# Altium PCB SleepTrackerPoC.PcbDoc
Units mm, origin at the board's own origin, x right, y up, seen from the top; angles counter-clockwise.
Board outline 24 x 24.8 mm, 2 copper layers (Top Layer, Bottom Layer), stack 1.671 mm thick; 33 components, 19 nets, 133 pads, 48 vias.
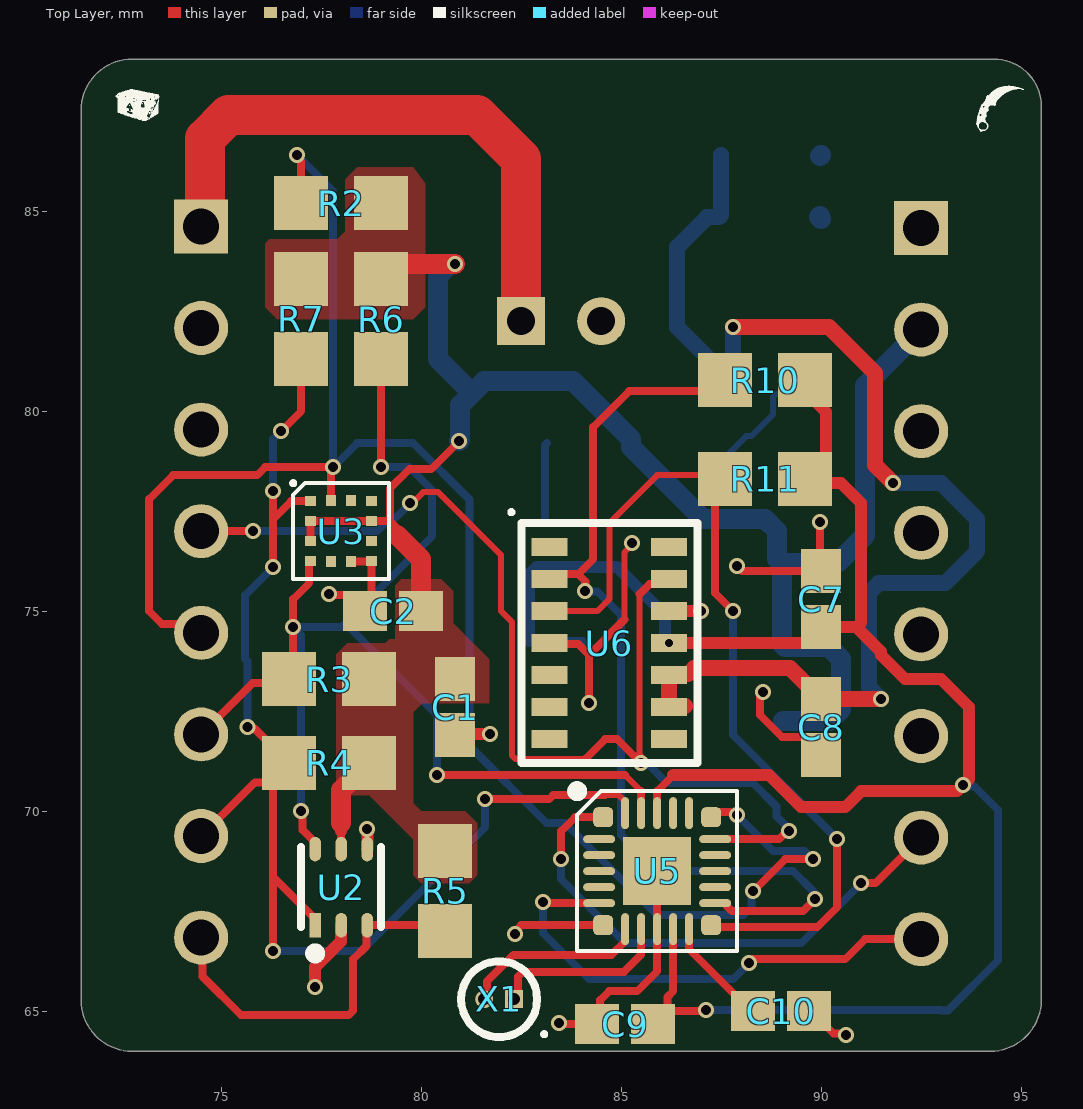
[diagram p0: Top Layer view]
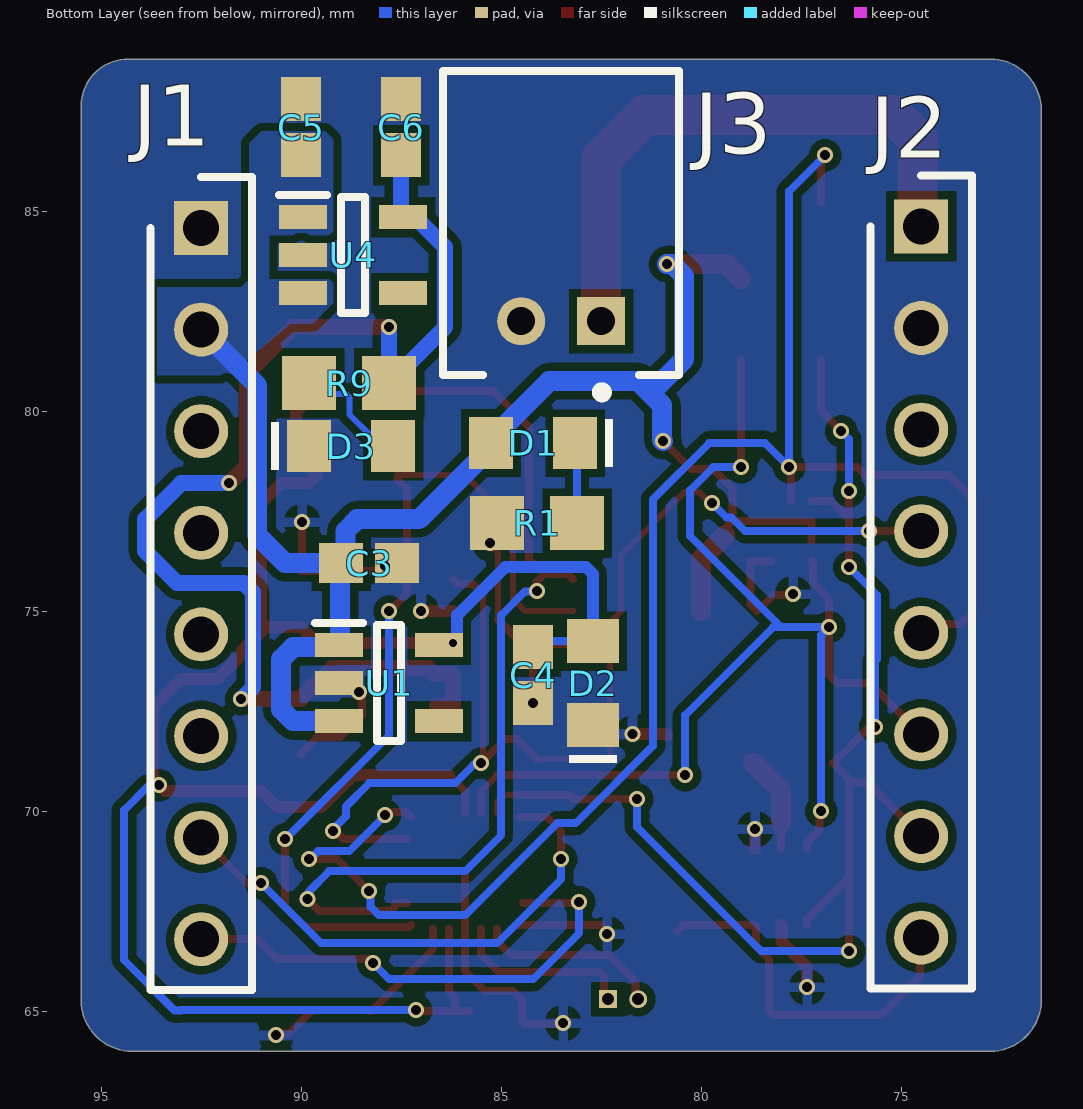
[diagram p1: Bottom Layer view, seen from below]
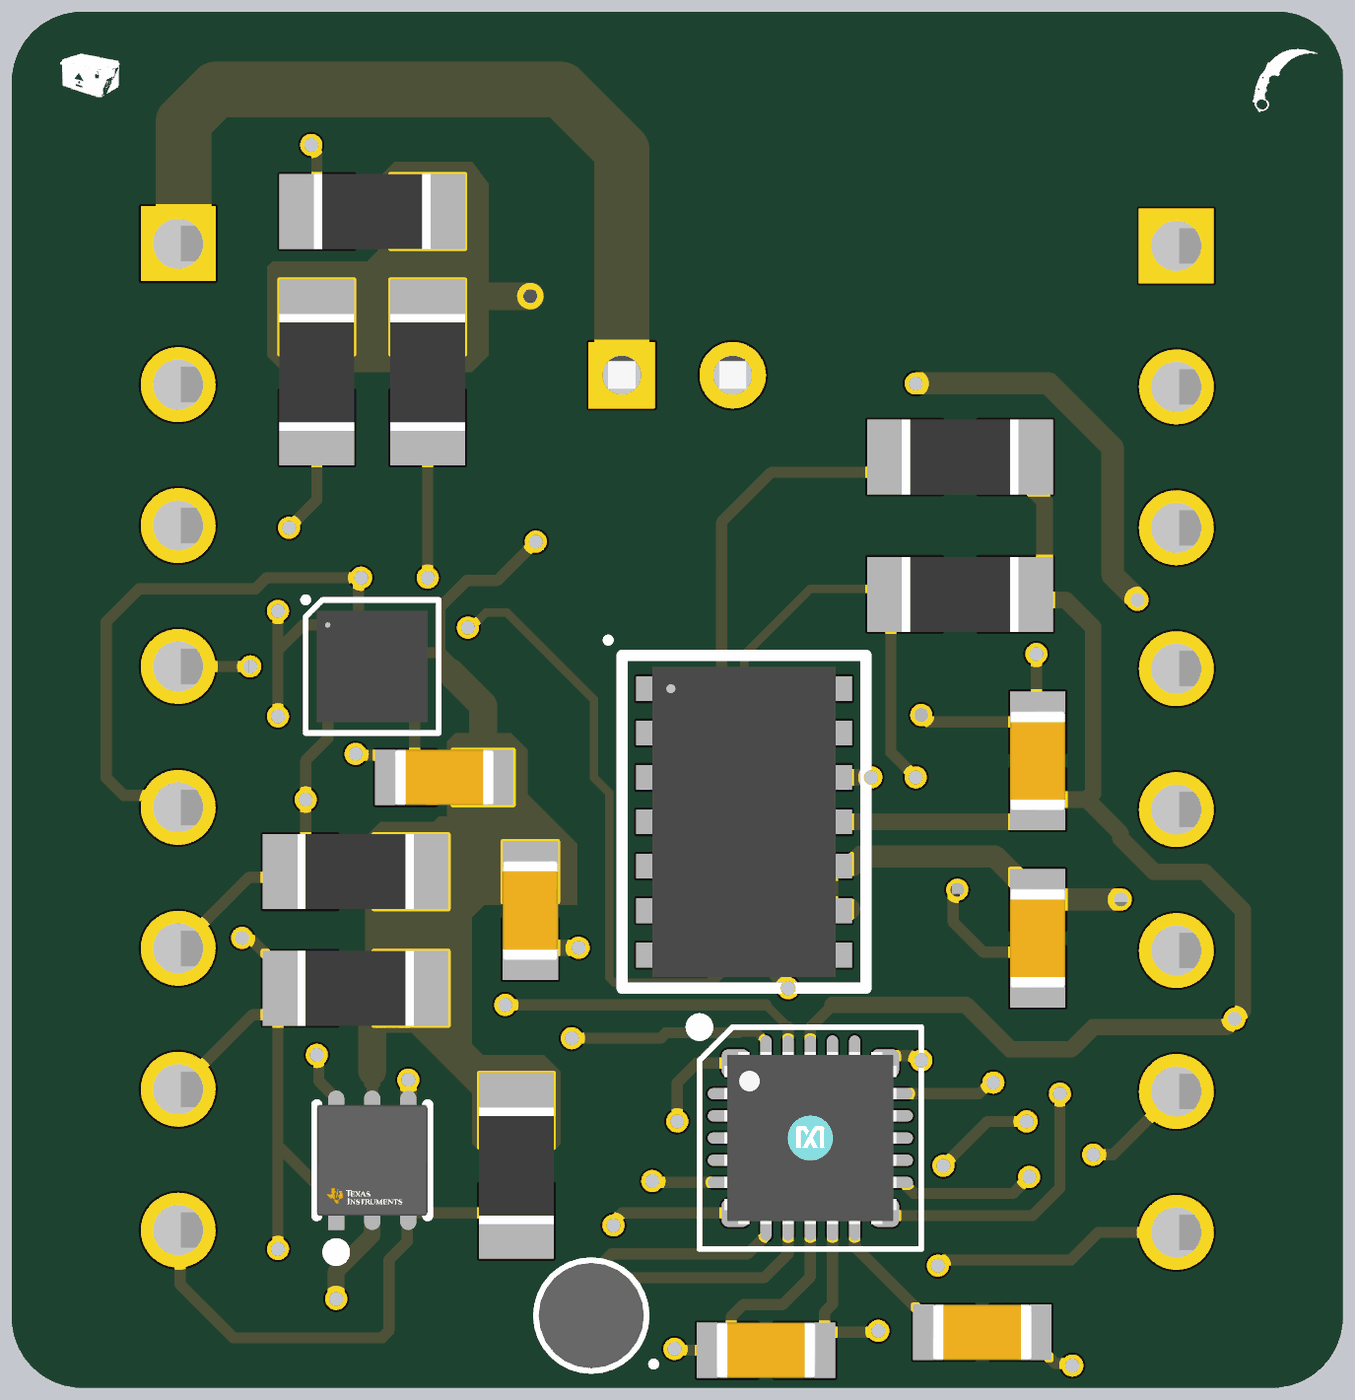
[diagram p2: 3D render of the assembled board from above, using the file's embedded part models]
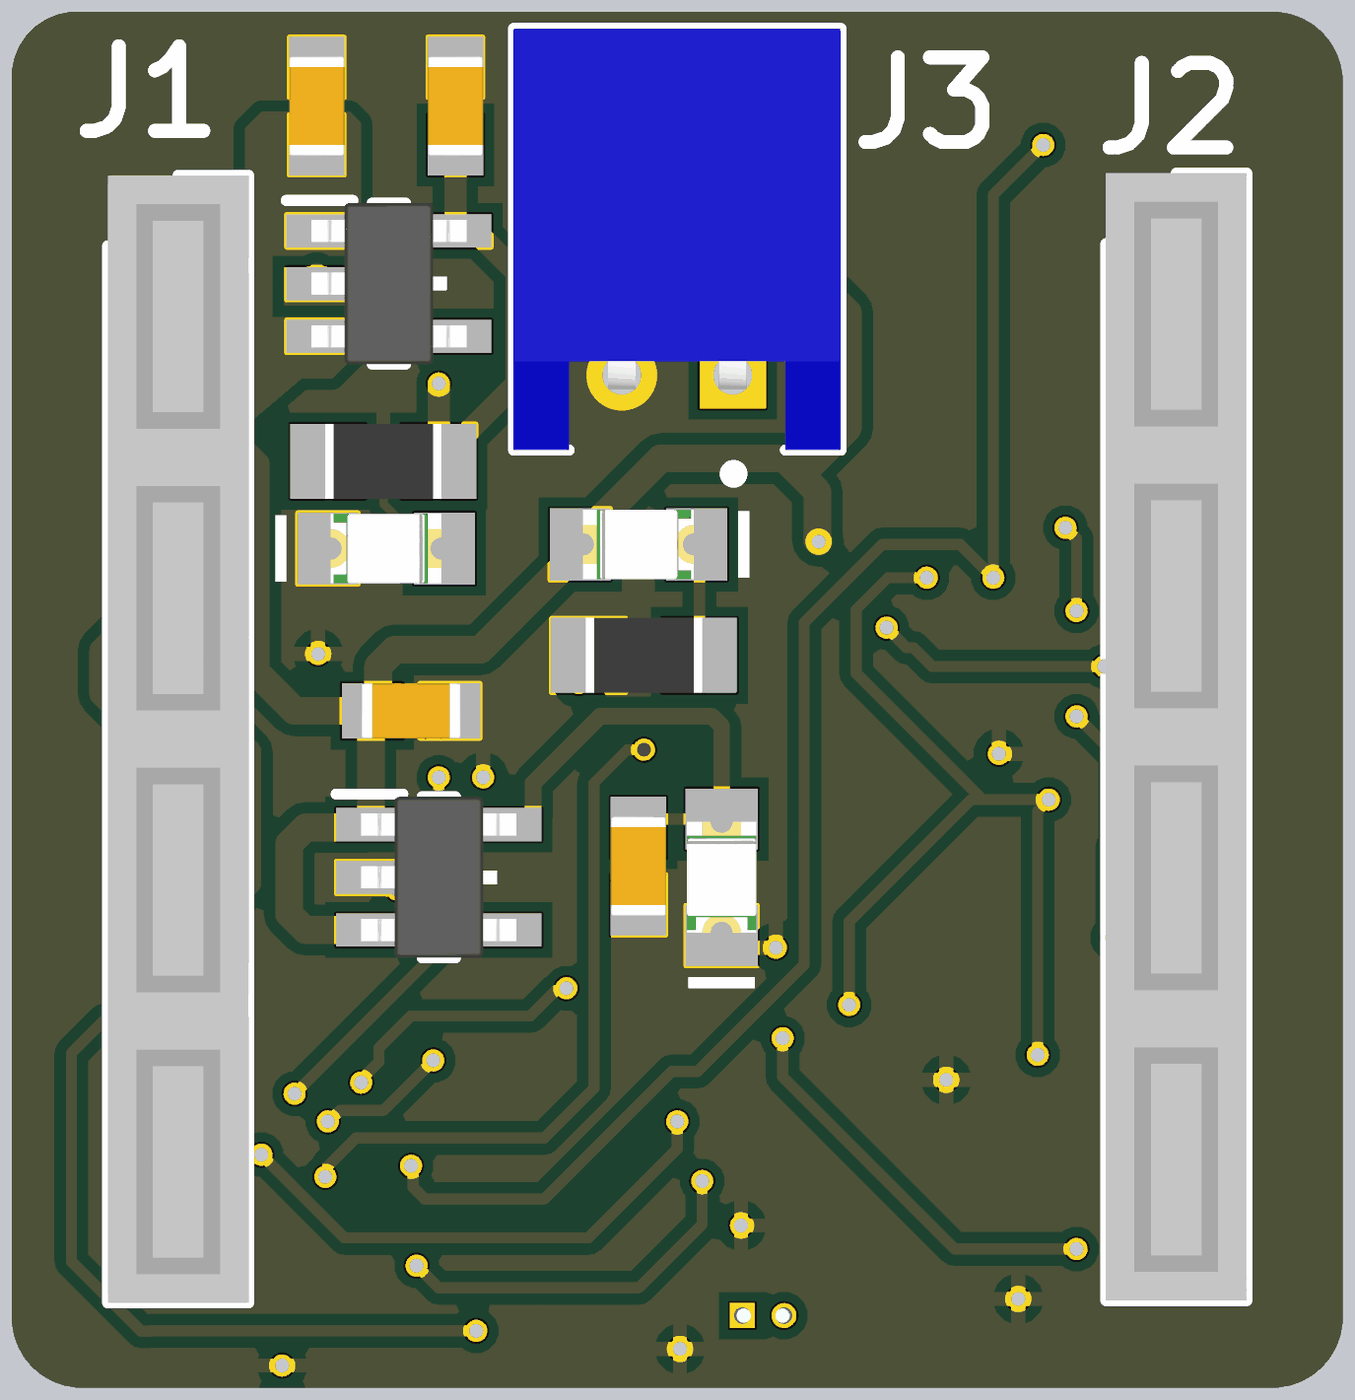
[diagram p3: 3D render of the assembled board from below, using the file's embedded part models]

## Layer stack, top to bottom
Top Solder: solder mask 0.0102, Solder Resist, Dk 3.5
Top Layer: signal copper 0.0356
Dielectric 1: dielectric 1.6, FR-4, Dk 4.8
Bottom Layer: signal copper 0.0356
Bottom Solder: solder mask 0.0102, Solder Resist, Dk 3.5

## Board outline
71.5,65.27 ccw(c72.77,65.27) 72.77,64 94.23,64 ccw(c94.23,65.27) 95.5,65.27 95.5,87.63 ccw(c94.33,87.63) 94.33,88.8 72.77,88.8 ccw(c72.77,87.53) 71.5,87.53

## Design rules (kind name [scope] priority, off if disabled: settings)
AssemblyTestPointUsage [All] p1: isadvanced=TRUE
AssemblyTestpoint [All] p1: isadvanced=TRUE testpointundercomponent=TRUE minsize=1.016 maxsize=2.54 preferedsize=1.524 minholesize=0 maxholesize=1.016 preferedholesize=0.813 testpointgrid=0.025 usegrid=TRUE gridtolerance=0 allowsidetop=TRUE allowsidebottom=TRUE
Clearance Clearance_1 [OnMid vs OnMid] p1: gap=0.2 ignorepadtopadclearanceinfootprint=FALSE except(0.254: Hole-Hole) sourcerule=54 cellrowname=All cellrowtype=0 cellcolname=All cellcoltype=0 innerlayers=TRUE
Clearance Clearance_2 [(ExistsOnLayer('Top Layer') Or ExistsOnLayer('Bottom Layer')) vs (ExistsOnLayer('Top Layer') Or ExistsOnLayer('Bottom Layer'))] p2: gap=0.2 ignorepadtopadclearanceinfootprint=FALSE except(0.254: Hole-Hole) sourcerule=54 cellrowname=All cellrowtype=0 cellcolname=All cellcoltype=0 outerlayers=TRUE
Clearance [All] p3: gap=0.254 ignorepadtopadclearanceinfootprint=FALSE except(0: Arc-Hole Track-Hole SMDPad-Hole THPad-Hole Via-Hole Fill-Hole Poly-Hole Region-Hole Text-Hole) ismatrix=TRUE
ComponentClearance [All] p1: isadvanced=TRUE gap=0.254 collisioncheckmode=3 verticalgap=0.254 showdistances=FALSE
FabricationTestPointUsage [All] p1: isadvanced=TRUE valid=0 allowmultiple=FALSE
FabricationTestpoint [All] p1: isadvanced=TRUE side=3 testpointundercomponent=TRUE minsize=1.016 maxsize=2.54 preferedsize=1.524 minholesize=0 maxholesize=1.016 preferedholesize=0.813 testpointgrid=0.025 allowsidetop=TRUE allowsidebottom=TRUE usegrid=TRUE gridtolerance=0
FanoutControl Fanout_BGA [IsBGA] p1: isadvanced=TRUE bgadir=Out bgaviamode=Centered fanoutstyle=Auto fanoutdirection=Alternating viagrid=0.025 // Fanout_BGA (Default Rule)
FanoutControl Fanout_LCC [IsLCC] p2: isadvanced=TRUE bgadir=Out bgaviamode=Centered fanoutstyle=Auto fanoutdirection=Alternating viagrid=0.025 // Fanout_LCC (Default Rule)
FanoutControl Fanout_SOIC [IsSOIC] p3: isadvanced=TRUE bgadir=Out bgaviamode=Centered fanoutstyle=Auto fanoutdirection=Alternating viagrid=0.025 // Fanout_SOIC (Default Rule)
FanoutControl Fanout_Small [(CompPinCount < 5)] p4: isadvanced=TRUE bgadir=Out bgaviamode=Centered fanoutstyle=Auto fanoutdirection=OutThenIn viagrid=0.025 // Fanout_Small (Default Rule)
FanoutControl Fanout_Default [All] p5: isadvanced=TRUE bgadir=Out bgaviamode=Centered fanoutstyle=Auto fanoutdirection=Alternating viagrid=0.025 // Fanout_Default (Default Rule)
Height [All] p1: isadvanced=TRUE minheight=0 maxheight=25.4 prefheight=12.7
HoleSize [All] p1: isadvanced=TRUE absolutevalues=TRUE maxlimit=6.3 minlimit=0.15 maxpercent=80.000 minpercent=20.000
HoleToHoleClearance [All] p1: isadvanced=TRUE gap=0.45 allowstackedmicrovias=TRUE
LayerPairs [All] p1: isadvanced=TRUE enforce=TRUE
MinimumSolderMaskSliver [All] p1: isadvanced=TRUE minsoldermaskwidth=0.05
NetAntennae [All] p1: isadvanced=TRUE netantennaetolerance=0
PasteMaskExpansion [All] p1: isadvanced=TRUE expansion=0
PlaneClearance [All] p1: isadvanced=TRUE clearance=0.508
PlaneConnect [All] p1: isadvanced=TRUE planeconnectstyle=Direct reliefexpansion=0.508 reliefentries=4 reliefconductorwidth=0.254 reliefairgap=0.254
PolygonConnect [All] p1: thpad.connectstyle=Direct thpad.reliefconductorwidth=0.254 thpad.reliefentries=4 thpad.polygonreliefangle="90 Angle" thpad.airgapwidth=0.254 smdpad.connectstyle=Direct smdpad.reliefconductorwidth=0.254 smdpad.reliefentries=4 smdpad.polygonreliefangle="90 Angle" smdpad.airgapwidth=0.254 via.connectstyle=Relief via.reliefconductorwidth=0.254 via.reliefentries=4 via.polygonreliefangle="90 Angle" via.airgapwidth=0.254
RoutingCorners [All] p1: isadvanced=TRUE cornerstyle=45-Degree minsetback=2.54 maxsetback=2.54
RoutingPriority [All] p1: isadvanced=TRUE routingpriority=0
RoutingVias RoutingViaStyle_1 [All] p1: isadvanced=TRUE holewidth=0.2 width=0.35 viastyle="Through Hole" minholewidth=0.15 minwidth=0.25 maxholewidth=0.25 maxwidth=0.4
RoutingVias [All] p2: holewidth=0.711 width=1.27 viastyle="Through Hole" minholewidth=0.711 minwidth=1.27 maxholewidth=0.711 maxwidth=1.27
ShortCircuit [All] p1: isadvanced=TRUE allowed=FALSE
SilkToSilkClearance [All] p1: isadvanced=TRUE silktosilkclearance=0.15
SilkToSolderMaskClearance [IsPad] p1: isadvanced=TRUE minsilkscreentomaskgap=0.15 clearancetoexposedcopper=TRUE
SolderMaskExpansion [All] p1: isadvanced=TRUE expansion=0.038 istentingtop=FALSE
SupplyNets "Schematic Supply Nets_15" [InNet('GND')] p1: isadvanced=TRUE voltage=0.000
SupplyNets "Schematic Supply Nets_14" [InNet('VBAT')] p2: isadvanced=TRUE voltage=0.000
SupplyNets "Schematic Supply Nets_13" [InNet('1V8')] p3: isadvanced=TRUE voltage=0.000
SupplyNets "Schematic Supply Nets_12" [InNet('3V3')] p4: isadvanced=TRUE voltage=0.000
SupplyNets "Schematic Supply Nets_8" [InNet('5V')] p5: isadvanced=TRUE voltage=0.000
SupplyNets "Schematic Supply Nets_11" [InNet('5V')] p6: isadvanced=TRUE voltage=0.000
SupplyNets "Schematic Supply Nets_10" [InNet('3V3')] p7: isadvanced=TRUE voltage=0.000
SupplyNets "Schematic Supply Nets_9" [InNet('VBAT')] p8: isadvanced=TRUE voltage=0.000
SupplyNets "Schematic Supply Nets_7" [InNet('1V8')] p9: isadvanced=TRUE voltage=0.000
SupplyNets "Schematic Supply Nets_6" [InNet('GND')] p10: isadvanced=TRUE voltage=0.000
SupplyNets "Schematic Supply Nets_5" [InNet('VBAT')] p11: isadvanced=TRUE voltage=0.000
SupplyNets "Schematic Supply Nets_4" [InNet('3V3')] p12: isadvanced=TRUE voltage=0.000
SupplyNets "Schematic Supply Nets_3" [InNet('GND')] p13: isadvanced=TRUE voltage=0.000
SupplyNets "Schematic Supply Nets_2" [InNet('VBAT')] p14: isadvanced=TRUE voltage=0.000
SupplyNets "Schematic Supply Nets_1" [InNet('3V3')] p15: isadvanced=TRUE voltage=0.000
SupplyNets "Schematic Supply Nets" [InNet('GND')] p16: isadvanced=TRUE voltage=0.000
UnRoutedNet [All] p1: isadvanced=TRUE checkbadconnections=TRUE
UnpouredPolygon [All] p1: isadvanced=TRUE
Width MaxMinWidth_1 [All] p1: isadvanced=TRUE maxlimit=1 minlimit=0.1 preferedwidth=0.3 minimp=50.000000 maximp=50.000000 favimp=50.000000
Width [All] p2: maxlimit=0.254 minlimit=0.254 preferedwidth=0.254
4 further rules are at their usual default settings.

## Components (designator, comment, footprint, x,y, rotation, side; value= is the part's Value field where it differs from the comment)
C1 "CAP_0603" CAP_0603 80.85,72.6 r90 top
C2 "CAP_0603" CAP_0603 79.3,75 r180 top
C3 "CAP_0603" CAP_0603 88.3,76.2 r180 bottom
C4 "CAP_0603" CAP_0603 84.2,73.4 r270 bottom
C5 "CAP_0603" CAP_0603 90,87.1 r90 bottom
C6 "CAP_0603" CAP_0603 87.5,87.1 r90 bottom
C7 "CAP_0603" CAP_0603 90,75.3 r90 top
C8 "CAP_0603" CAP_0603 90,72.1 r270 top
C9 "CAP_0603" CAP_0603 85.1,64.675 r180 top
C10 "CAP_0603" CAP_0603 89,65 r0 top
D1 "150080VS75000" WL-SMCW_0805_150080xx75000 84.2,79.2 r0 bottom
D2 "150080RS75000" WL-SMCW_0805_150080xx75000 82.7,73.2 r90 bottom
D3 "150080BS75000" WL-SMCW_0805_150080xx75000 88.75,79.125 r180 bottom
J1 "90147-1108" RHDR8W70P0X254_1X8_2017X244X870P 92.5,84.58 r270 bottom
J2 "90147-1108" RHDR8W70P0X254_1X8_2017X244X870P 74.5,84.62 r270 bottom
J3 "S2B-PH-K-S(LF)(SN)" JST-S2B-PH-K-S_V 83.5,84.7 r0 bottom
R1 "RES_0805" RES_0805 84.1,77.2 r0 bottom
R2 "RES_0805" RES_0805 78,85.2 r180 top
R3 "RES_0805" RES_0805 77.7,73.3 r0 top
R4 "RES_0805" RES_0805 77.7,71.2 r0 top
R5 "RES_0805" RES_0805 80.6,68 r90 top
R6 "RES_0805" RES_0805 79,82.3 r90 top
R7 "RES_0805" RES_0805 77,82.3 r90 top
R9 "RES_0805" RES_0805 88.8,80.7 r180 bottom
R10 "RES_0805" RES_0805 88.6,80.775 r0 top
R11 "RES_0805" RES_0805 88.6,78.3 r0 top
U1 "MIC5504-1.8YM5-TR" SOT95P280X145-5N 87.8,73.2 r180 bottom
U2 "TMP117MAIDRVR" FP-DRV0006B-IPC_C 78,68.1 r90 top
U3 "MC3479" MC3479 78,77 r0 top
U4 "TPS7A2050PDBVR" SOT95P280X145-5N 88.7,83.9 r180 bottom
U5 "MAX32664GTGA+T" MAX32664 85.9,68.5 r0 top
U6 "MAX30101" MAX30101 84.705,74.2 r0 top
X1 "CFS-20632768DZBB" CFS20632768DZBB 82.3,65.3 r90 top

## Footprints (in the part's own frame and the unit in brackets; to place one, negate y for a bottom-side part, rotate by r counter-clockwise, add the part's x,y. Pads: shape width x height; smd on the part's side, far side on the other; paste and mask are expansions set on the pad)
CAP_0603 [mm] "Chip Capacitor, 2-Leads, Body 1.60x0.80mm, IPC Medium Density"
  rect 1.1x1 smd: 1(-0.7,0) 2(0.7,0)
  body extent -0.9,-0.5 0.9,0.5, height 1
CFS20632768DZBB [mm]
  rect 0.45x0.45 hole 0.3: 1(0,-0.025)
  round 0.45 hole 0.3: 2(0,0.725)
  silkscreen extent -0.95,-0.82 0.95,1.3, body extent -0.94,-0.6 0.94,1.3, height 6.3
FP-DRV0006B-IPC_C [mm]
  rect 0.611x0.292 smd paste+0 mask+0: 1(-0.951,0.65)
  rrect100% 0.611x0.292 smd paste+0 mask+0: 2(-0.951,0) 3(-0.951,-0.65) 4(0.951,-0.65) 5(0.951,0) 6(0.951,0.65)
  silkscreen extent -1.78,-1 1,1, body extent -1.36,-1.1 1.36,1.1, height 0.25
JST-S2B-PH-K-S_V [mm] "THD, 2-Leads, Body 7.6x5.9mm, Pitch 2mm"
  rect 1.2x1.2 hole 0.7: 1(-1,2.45)
  round 1.2 hole 0.7: 2(1,2.45)
  silkscreen extent -2.95,-3.8 2.95,4.35, body extent -2.95,-3.8 2.95,3.8, height 4.8
MAX30101 [mm] "SON, 14-Leads, Body 5.50x3.20mm, Pitch 0.80mm, IPC Medium Density"
  rect 0.9x0.45 smd: 1(-1.495,2.4) 2(-1.495,1.6) 3(-1.495,0.8) 4(-1.495,0) 5(-1.495,-0.8) 6(-1.495,-1.6) 7(-1.495,-2.4) 8(1.495,-2.4) 9(1.495,-1.6) 10(1.495,-0.8) 11(1.495,0) 12(1.495,0.8) 13(1.495,1.6) 14(1.495,2.4)
  silkscreen extent -2.5,-3 2.2,3.32, body extent -1.65,-2.79 1.65,2.79, height 1.65
MAX32664 [mm] "QFN, 28-Leads, Body 3.00x3.00mm, Pitch 0.40mm, Thermal Pad 1.70x1.70mm, IPC Medium Density"
  rrect50% 0.5x0.5 smd mask+0.038: 1(-1.35,1.35) 7(-1.35,-1.35) 13(1.35,-1.35) 19(1.35,1.35)
  oval 0.8x0.2 smd mask+0.038: 2(-1.45,0.8) 3(-1.45,0.4) 4(-1.45,0) 5(-1.45,-0.4) 6(-1.45,-0.8) 14(1.45,-0.8) 15(1.45,-0.4) 16(1.45,0) 17(1.45,0.4) 18(1.45,0.8)
  oval 0.2x0.8 smd mask+0.038: 8(-0.8,-1.45) 9(-0.4,-1.45) 10(0,-1.45) 11(0.4,-1.45) 12(0.8,-1.45) 20(0.8,1.45) 21(0.4,1.45) 22(0,1.45) 23(-0.4,1.45) 24(-0.8,1.45)
  rect 1.7x1.7 smd mask+0.038: 25(0,0)
  silkscreen extent -2.12,-2 2,2.12, body extent -1.55,-1.55 1.55,1.55, height 0.8
MC3479 [mm]
  rect 0.275x0.25 smd: 1(-0.762,0.75) 2(-0.762,0.25) 3(-0.762,-0.25) 4(-0.762,-0.75) 7(0.763,-0.75) 8(0.763,-0.25) 9(0.763,0.25) 10(0.763,0.75)
  rect 0.25x0.275 smd: 5(-0.25,-0.763) 6(0.25,-0.763) 11(0.25,0.762) 12(-0.25,0.762)
  silkscreen extent -1.25,-1.2 1.2,1.25, body extent -1,-1 1,1, height 0.99
RES_0805 [mm]
  rect 1.35x1.35 smd: 1(-1,0) 2(1,0)
  body extent -1.05,-0.67 1.05,0.67, height 0.6
RHDR8W70P0X254_1X8_2017X244X870P [mm]
  rect 1.35x1.35 / inner round 1.35 / far side rect 1.35x1.35 hole 0.9: 1(0,0)
  round 1.35 hole 0.9: 2(2.54,0) 3(5.08,0) 4(7.62,0) 5(10.16,0) 6(12.7,0) 7(15.24,0) 8(17.78,0)
  silkscreen extent -1.27,-1.27 19.05,1.27, body extent -1.27,-1.27 19.05,1.27, height 8.51
SOT95P280X145-5N [mm]
  rect 1.2x0.6 smd: 1(-1.25,0.95) 2(-1.25,0) 3(-1.25,-0.95) 4(1.25,-0.95) 5(1.25,0.95)
  silkscreen extent -1.85,-1.45 0.3,1.5, body extent -1.4,-1.45 1.4,1.45, height 1.2
WL-SMCW_0805_150080xx75000 [mm] "SMD Mono-color Chip LED, body 2.0x1.25mm"
  rect 1.1x1.3 smd: 1(-1.05,0) 2(1.05,0)
  silkscreen extent -2,-0.6 -1.8,0.6, body extent -1,-0.63 1,0.62, height 0.7

## Part data
C1 C2 C3 C4 C5 C6 C7 C8 C9 C10: library part "Capacitor SMT 0603"
D1: library part CMP-1426-00009-6, "WL-SMCW SMT Mono-Color Chip LED Waterclear", Case Code (Imperial)=0805, Case Code (Metric)=2012, Color=Green, Forward Current=100mA, Forward Voltage=2V, Max Junction Temperature (Tj)=95°C, Max Operating Temperature=85°C, Max Reverse Voltage (DC)=5V, Min Operating Temperature=-40°C, Power Dissipation=72mW, Test Current=20mA, Case/Package=0805, Dominant Wavelength=570nm, Height=700µm, Length=2mm, Lens Style="Clear, Rectangular", Luminous Intensity=40mcd, Mount="Surface Mount", Packaging="Tape and Reel", Peak Wavelength=572nm, REACH SVHC=Unknown, Reverse Voltage=5V, RoHS=Compliant, Viewing Angle=140°, Wavelength=570nm, Width=1.25mm
D2: library part CMP-1426-00011-3, "LED Uni-Color Red 630nm 2-Pin Chip 0805(2012Metric) T/R", Case Code (Imperial)=0805, Case Code (Metric)=2012, Color=Red, Forward Current=100mA, Forward Voltage=2V, Max Junction Temperature (Tj)=95°C, Max Operating Temperature=85°C, Max Reverse Voltage (DC)=5V, Min Operating Temperature=-40°C, Power Dissipation=72mW, Test Current=20mA, Case/Package=0805, Dominant Wavelength=625nm, Height=700µm, Length=2mm, Lens Style="Clear, Rectangular", Luminous Intensity=150mcd, Mount="Surface Mount", Packaging="Tape and Reel", Peak Wavelength=630nm, REACH SVHC=Unknown, RoHS=Compliant, Viewing Angle=140°, Wavelength=625nm, Width=1.25mm
D3: library part CMP-1426-00008-7, "Led, Blue, 470 Nm, 3.2 V, 30 Ma, 145 Mcd Rohs Compliant: Yes", Case Code (Imperial)=0805, Case Code (Metric)=2012, Color=Blue, Forward Current=100mA, Forward Voltage=3.2V, Max Junction Temperature (Tj)=95°C, Max Operating Temperature=85°C, Max Reverse Voltage (DC)=5V, Min Operating Temperature=-40°C, Power Dissipation=105mW, Test Current=20mA, Case/Package=0805, Dominant Wavelength=470nm, Height=700µm, Lead Free="Lead Free", Length=2mm, Lens Style="Clear, Rectangular", Luminous Intensity=145mcd, Mount="Surface Mount", Packaging="Tape and Reel", Peak Wavelength=465nm, REACH SVHC=Unknown, Reverse Voltage=5V, RoHS=Compliant, Viewing Angle=140°, Wavelength=470nm, Width=1.25mm
J1 J2: "Headers & Wire Housings 8CKT VERT SR CON", Manufacturer_Name=Molex, Mouser Part Number=538-90147-1108, Datasheet Link=https://www.molex.com/pdm_docs/sd/901471102_sd.pdf, Geometry.Height=8.7mm, Manufacturer_Part_Number=90147-1108, Mouser Price/Stock=https://www.mouser.co.uk/ProductDetail/Molex/90147-1108?qs=QESXi79X%252BKqiwXr7kUdEeg%3D%3D
J3: library part CMP-1755-00004-1, "Male Header, Pitch 2 mm, 1 x 2 Position, Height 4.8 mm, Tail Length 3.4 mm, -25 to 85 degC, RoHS, Bulk", Capacitance="10 uF", Case\Package=Radial, Max Operating Temperature="85 degC", Min Operating Temperature="-40 degC", Package Quantity=200, Tolerance=20%, Voltage Rating="50 V", ComponentLink1Description=Datasheet, ComponentLink1URL=http://www.jst-mfg.com/product/pdf/eng/ePH.pdf, DatasheetVersion=Dec-12, Diameter="5 mm", Height="11 mm", Lead Pitch="2 mm", Length="11 mm", Mount="Through Hole", PackageDescription="Male Header, Pitch 2 mm, 1 x 2 Position, Height 4.8 mm, Tail Length 3.4 mm", PackageReference=S2B-PH-K-S, Packaging=Bulk, Pins=2, Radiation Hardening=No, REACH SVHC="No SVHC", RoHSCompliant=true, Voltage Rating (DC)="50 V"
R1 R2 R3 R4 R5 R6 R7 R9 R10 R11: library part "Resistor SMT 0805"
U1: "Linear Voltage Regulator IC Positive Fixed Output 1.8V 300mA SOT-23-5", Manufacturer_Name=Microchip, Mouser Part Number=998-MIC5504-1.8YM5TR, Datasheet Link=http://www.microchip.com/mymicrochip/filehandler.aspx?ddocname=en580292, Geometry.Height=1.45mm, Manufacturer_Part_Number=MIC5504-1.8YM5-TR, Mouser Price/Stock=https://www.mouser.co.uk/ProductDetail/Microchip-Technology/MIC5504-1.8YM5-TR?qs=U6T8BxXiZAWcKt0MaB%252BQvA%3D%3D
U2: library part CMP-04948-000036-1, "TEMPERATURE SENSOR", Max Operating Temperature=150°C, Min Operating Temperature=-55°C, Mount="Surface Mount", Output Type=I2C, Packaging="Cut Tape", Resolution=16b, RoHS Compliant=Yes
U3: "Accelerometers Small Digital 3-axis Accelerometer Sensor", Manufacturer_Name=MEMSIC, Mouser Part Number=498-MC3479, Datasheet Link=http://www.memsic.com/uploadfiles/2020/08/20200827164636363.pdf, Geometry.Height=1mm, Manufacturer_Part_Number=MC3479, Mouser Price/Stock=https://www.mouser.co.uk/ProductDetail/MEMSIC/MC3479?qs=OlC7AqGiEDmYmlaMvA9fTA%3D%3D
U4: "LDO Voltage Regulators 300-mA, ultra-low-noise, low-IQ, low-dropout (LDO) linear regulator with high PSRR", Manufacturer_Name="Texas Instruments", Mouser Part Number=595-TPS7A2050PDBVR, Datasheet Link=https://www.ti.com/lit/gpn/tps7a20?HQS=ti-null-null-sf-df-pf-sep-wwe&DCM=yes, Geometry.Height=1.45mm, Manufacturer_Part_Number=TPS7A2050PDBVR, Mouser Price/Stock=https://www.mouser.co.uk/ProductDetail/Texas-Instruments/TPS7A2050PDBVR?qs=hd1VzrDQEGgpoyZ%2F5FZYnQ%3D%3D
U5: "Maxim Integrated MAX32664GTGA+T Sensor Hub"
U6: "Maxim Integrated MAX30101 Oximetry Sensor"
X1: "32.768 kHz +/-20ppm Crystal 6pF 35 kOhms Cylindrical Can, Radial", Manufacturer_Name="CITIZEN FINEDEVICE", Mouser Part Number=695-CFS-20632768DZBB, Datasheet Link=http://cfd.citizen.co.jp/cms/cfd/pdf/english/CFS-206_CFS-145_E.pdf, Geometry.Height=6.2mm, Manufacturer_Part_Number=CFS-20632768DZBB, Mouser Price/Stock=https://www.mouser.co.uk/ProductDetail/Citizen-FineDevice/CFS-20632768DZBB?qs=byeeYqUIh0PqzGU2nG5Zjg%3D%3D

## Via types
v1: diameter 0.4, hole 0.25, Top Layer to Bottom Layer, 47 vias
v2: diameter 0.35, hole 0.2, Top Layer to Bottom Layer, 1 vias

## Nets (pads, with @x,y where several pads share a name; then routed paths per layer and width w, separated by ;. In a path a pad name is that pad's centre, name@x,y a point inside that pad or via, vN(x,y) a via of type N, cw(c..) or ccw(c..) an arc to the next point about the centre after c; other vN are vias at no path point)
1V8: C4.1 C7.1 C9.1 D2.2 R10.2 R11.2 U1.5 U5.11 U5.22 U6.11 | length 52.5
  Top Layer w0.2: U5.22 85.9,70.5 86.3,70.9 ; C9.1@86.158,65 v1@87.065,65 ; U5.11 86.3,65.5 86.158,65.358 86.158,65.075 C9.1@86.083,65 ; v1(87.125,65.025) cw(c87.065,65.085) v1@87.065,65 ; C9.1@86.083,65 v1@87.065,65 ; C9.1@86.083,65 85.8,65 C9.1@86.083,65
  Top Layer w0.3: v2(86.2,74.2) 89.6,74.2 C7.1 90.883,74.6 ; 86.3,70.9 88.7,70.9 89.5,70.1 90.6,70.1 91,70.5 93.4,70.5 v1(93.55,70.65) 93.7,70.8 93.7,72.6 93,73.3 92.1,73.3 91.491,73.909 91.491,73.991 90.883,74.6 ; R10.2@89.6,80.5 90.125,79.975 90.125,78.925 89.6,78.4 89.8,78.2 90.5,78.2 91,77.7 91,74.717 90.883,74.6
  Bottom Layer w0.2: D2.2 84.05,74.25 C4.1 ; v1(87.125,65.025) 93,65.025 93.005,65.02 93.17,65.02 94.425,66.275 94.425,70.025 93.829,70.621 93.579,70.621 v1(93.55,70.65)
  Bottom Layer w0.3: D2.2 82.701,75.924 82.876,76.1 84.9,76.1 86.1,74.9 86.1,74.3 86.25,74.15 U1.5
3V3: C1.2 C2.1 C3.1 C5.1 D1.2 J1.2 R2.1 R3.2 R4.2 R5.2 R6.2 R7.2 U1.1 U1.3 U2.5 U3.2 U3.3 U3.9 U4.1 U4.3 | length 43.5
  Top Layer w0.2: U3.3 U3.2 U3.9 79.224,77.25 ; U2.5 78,69.5 ; 79.4,76.9 79.4,77.074 79.224,77.25 ; v1(80.95,79.25) 80.25,78.55 79.702,78.55 79.224,78.072 79.224,77.25
  Top Layer w0.3: 78,69.5 78,69.7
  Top Layer w0.5: 78,69.7 78,70.525 78.675,71.2 R4.2 R4.2@78.275,70.775 ; R6.2 79.375,83.675 v1(80.85,83.675) ; 79.4,76.9 80,76.3 C2.1
  Bottom Layer w0.5: v1(80.85,83.675) 80.718,83.675 80.425,83.382 80.425,81.3 81.275,80.45 ; v1(80.95,79.25) 80.975,79.275 80.975,80.15 81.275,80.45 ; U1.3 90.207,72.25 90.5,72.543 90.5,73.8 90.2,74.1 89.1,74.1 U1.1 89.025,74.175 89.025,76.175 C3.1 ; U4.1@89.975,84.875 U4.1 U4.1@90,84.8 ; C5.1@89.975,86.375 C5.1 ; J1.2@92.305,82.04 J1.2 91.1,80.64 91.1,76.9 90.4,76.2 C3.1 ; 81.275,80.45 81.575,80.75 83.8,80.75 85.25,79.3 D1.2 85.25,79.1 87.05,77.3 88.6,77.3 88.893,77.007 88.893,76.307 C3.1
5V: C6.1 C8.1 R9.2 U4.5 U6.9 U6.10 | length 31.4
  Top Layer w0.4: U6.9@86.6,72.625 86.225,72.625 U6.9 U6.10 86.225,73.425 86.675,73.425 86.825,73.575 89.225,73.575 89.65,73.15 89.7,73.15 90,72.85 C8.1 91.4,72.8 v1(91.5,72.8) ; v1(87.8,82.1) 90.2,82.1 91.35,80.95 91.35,78.65 v1(91.8,78.2)
  Bottom Layer w0.4: C6.1 87.5,84.9 U4.5 87.15,84.85 86.4,84.1 86.4,82.1 R9.2 v1(87.8,82.1) ; v1(91.5,72.8) 91.2,73.1 91.2,75.466 91.434,75.7 93.1,75.7 93.9,76.5 93.9,77.3 93,78.2 v1(91.8,78.2)
ACL_INT_1: J2.5 R2.2 U3.12 U5.19 | length 44.1
  Top Layer w0.2: J2.5 74.285,74.675 73.525,74.675 73.2,75 73.2,77.8 73.8,78.4 75.9,78.4 76.1,78.6 v1@77.762,78.6 ; v1(76.9,86.4) 76.9,86.346 77,86.246 R2.2 ; U3.12 77.75,78.45 77.762,78.462 77.762,78.562 v1(77.8,78.6) ; U5.19 87.385,69.985 87.715,69.985 87.8,69.9 v1(87.9,69.9) ; v1(88.3,68) 89.1,68.8 v1(89.8,68.8)
  Bottom Layer w0.2: v1(76.9,86.4) 77.8,85.5 v1(77.8,78.6) 78.4,79.2 79.8,79.2 81.21,77.79 81.21,71.626 83.136,69.7 83.6,69.7 85.9,67.4 88.051,67.4 88.262,67.61 88.262,67.962 v1(88.3,68) ; v1(87.9,69.9) 88.8,69 89.583,69 89.783,68.8 v1(89.8,68.8)
GND: C1.1 C2.2 C3.2 C4.2 C5.2 C6.2 C7.2 C8.2 C9.2 C10.2 D2.1 D3.1 J1.1 J2.2 J3.2 R1.2 U1.2 U2.2 U2.4 U3.6 U3.7 U4.2 U5.7 U5.10 U5.25 U6.4 U6.12 | length 27.8
  Top Layer w0.15: 85.082,74.79 85.082,76.473 85.275,76.667 v1@85.275,76.675
  Top Layer w0.2: v1(77.7,75.425) 77.725,75.4 78.2,75.4 C2.2 78.763,75.163 U3.7 78.756,76.244 78.256,76.244 U3.6 ; v1(82.35,66.925) 82.35,67 82.5,67.15 U5.7 ; U6.4 83.235,74.175 83.933,74.175 84.2,73.908 ; v1(83.45,64.7) 83.475,64.675 C9.2 84.475,64.75 84.475,65.275 84.7,65.5 85.4,65.5 85.9,66 U5.10 U5.25 ; v1(84.2,72.7) 84.2,73.908 ; 85.082,74.79 84.2,73.908 ; v1@85.275,76.675 v1(85.275,76.7) ; v1(87.9,76.125) 87.9,76.117 88.017,76 C7.2 89.975,76.025 v1(89.975,77.225) ; v1(88.55,72.975) 88.475,72.9 88.475,72.4 89.025,71.85 89.6,71.85 90,71.45 C8.2 ; C10.2 89.75,65 90.312,64.438 90.587,64.438 v1(90.625,64.4)
  Top Layer w0.3: v1(77.35,65.6) 77.35,66.1 77.996,66.746 77.996,67.146 U2.2 ; U2.4 78.654,69.054 78.654,69.546 v1(78.65,69.55) ; C1.1 80.88,71.93 v1(81.722,71.93) ; U6.12 v1(87,75)
I2C_SCL: J2.7 R4.1 R7.1 U2.1 U3.1 U5.24 | length 32.4
  Top Layer w0.15: 84.6,70.4 84.936,70.4 85.1,70.236 U5.24
  Top Layer w0.2: J2.7 75.842,70.722 76.222,70.722 R4.1@76.3,70.8 ; v1(75.652,72.108) 75.69,72.07 75.83,72.07 R4.1 R4.1@76.3,70.8 ; v1(76.3,66.5) 76.3,68.359 ; v1(76.3,76.1) 76.3,77.3 ; v1(76.3,78) 76.3,77.3 ; v1(76.5,79.5) 77,80 R7.1 ; U3.1 76.75,77.75 76.3,77.3 ; U2.1 77.35,67.309 76.3,68.359 ; v1(81.6,70.3) 83.2,70.3 83.3,70.4 84.6,70.4 ; 76.3,68.359 R4.1@76.3,70.8
  Bottom Layer w0.2: v1(75.652,72.108) 75.652,73.755 75.6,73.807 75.6,75.4 v1(76.3,76.1) ; v1(76.3,66.5) 78.5,66.5 81.6,69.6 v1(81.6,70.3) ; v1(76.3,78) 76.3,79.3 v1(76.5,79.5)
I2C_SDA: J2.6 R3.1 R6.1 U2.6 U3.4 U5.23 | length 32.1
  Top Layer w0.15: 85.1,70.9 85.5,70.5
  Top Layer w0.2: J2.6 75.78,73.2 76.6,73.2 R3.1 76.8,73.4 v1(76.8,74.6) 76.8,75.3 77.2,75.7 U3.4@77.2,76.212 ; v1(77,70) 77.038,69.962 77.038,69.529 77.35,69.217 U2.6 ; U3.4@77.2,76.212 77.2,76.225 77.225,76.25 U3.4 ; v1(79,78.6) R6.1 ; v1(80.4,70.9) 85.1,70.9 ; U5.23 85.5,70.5
  Bottom Layer w0.2: v1(77,70) 77,74.4 v1(76.8,74.6) 78,74.6 ; v1(79,78.6) 79.7,78.6 80.275,78.025 80.275,76.875 78,74.6 ; v1(80.4,70.9) 80.4,72.4 78.2,74.6 78,74.6
MFIO: J1.7 U5.1 | length 13.2
  Top Layer w0.2: v1(83.5,68.8) 83.5,69.5 83.85,69.85 U5.1 ; v1(91,68.2) 91.36,68.2 J1.7
  Bottom Layer w0.2: v1(83.5,68.8) 83.5,68.3 85.1,66.7 89.5,66.7 v1(91,68.2)
NetC10_1: C10.1 U5.12 | length 2.7
  Top Layer w0.2: U5.12 86.7,66.55 88.25,65 C10.1
NetD1_1: D1.1 R1.1 | length 2
  Bottom Layer w0.2: R1.1 83.1,79.15 D1.1
NetD3_2: D3.2 R9.1 | length 3.2
  Bottom Layer w0.15: D3.2@87.65,78.8 87.65,78.9 88.125,79.375 88.251,79.375 88.792,79.916 88.792,80.346 88.88,80.434 89.534,80.434 R9.1
NetU5_8: U5.8 X1.2 | length 4.6
  Top Layer w0.2: X1.2@81.6,65.3 81.648,65.348 81.648,65.748 82.311,66.411 84.761,66.411 85.1,66.75 U5.8
NetU5_9: U5.9 X1.1 | length 4.6
  Top Layer w0.2: X1.1@82.3,65.3 82.425,65.425 82.425,65.867 82.542,65.984 85.07,65.984 85.5,66.414 U5.9
OXI_INT: J2.4 U5.18 U6.13 | length 29.1
  Top Layer w0.15: v1(79.725,77.7) 79.776,77.7 80.051,77.975 80.425,77.975 82,76.4 82,75 82.275,74.725 82.275,71.388 82.363,71.3 84.1,71.3 ; 85.458,75.425 85.458,71.38 v1@85.462,71.376
  Top Layer w0.2: J2.4 v1(75.8,77) ; 84.1,71.3 84.6,71.8 84.9,71.8 v1@85.377,71.323 ; v1@85.42,71.334 85.5,71.254 v1(85.5,71.2) 85.462,71.238 v1@85.462,71.376 ; 85.448,71.394 85.454,71.387 85.462,71.38 v1@85.462,71.323 ; 85.458,75.425 85.708,75.675 86.075,75.675 U6.13 ; U5.18 88.946,69.3 89.146,69.5 v1(89.2,69.5)
  Bottom Layer w0.2: v1(75.8,77) 78.9,77 79.238,77.338 79.363,77.338 v1(79.725,77.7) ; v1(85.5,71.2) 85.538,71.162 85.687,71.162 86.149,70.7 88.3,70.7 88.881,70.119 88.881,69.873 89.2,69.554 v1(89.2,69.5)
RSTN: J1.8 U5.6 | length 12.5
  Top Layer w0.2: v1(83.05,67.725) 83.075,67.7 U5.6 ; v1(88.2,66.2) 88.3,66.3 90.6,66.3 91.1,66.8 J1.8
  Bottom Layer w0.2: v1(83.05,67.725) 83.05,66.95 84.2,65.8 87.8,65.8 v1(88.2,66.2)
SENS_I2C_SCL: R10.1 U5.14 U6.2 | length 23.7
  Top Layer w0.2: U6.2 83.335,75.925 83.925,75.925 ; v1(84.1,75.5) 84.112,75.512 84.112,75.738 83.925,75.925 ; U5.14 87.65,67.7 87.65,67.617 87.767,67.5 89.546,67.5 v1(89.846,67.8) ; R10.1@87.6,80.5 85.2,80.5 84.3,79.6 84.3,76.3 83.925,75.925
  Bottom Layer w0.2: v1(84.1,75.5) 84.104,75.496 84.404,75.496 85,74.9 85,70.797 ; 85,70.775 85,69.4 85.9,68.5 89.3,68.5 89.808,67.992 89.808,67.851 v1@89.846,67.813
SENS_I2C_SDA: R11.1 U5.13 U6.3 | length 22.5
  Top Layer w0.15: U6.3 84.4,75 84.71,75.31 84.71,77.21 85.9,78.4 R11.1@87.6,78.4
  Top Layer w0.2: U5.13 87.3,67.1 89.9,67.1 90.4,67.6 v1(90.4,69.3) ; R11.1 87.35,78.05 87.35,75.45 v1(87.8,75)
  Bottom Layer w0.2: v1@87.8,75.1 87.8,71.9 v1@90.396,69.304
TMP_INT: J2.8 R5.1 U2.3 | length 9.5
  Top Layer w0.2: J2.8 74.535,66.805 74.535,65.865 75.5,64.9 78.183,64.9 78.3,65.017 78.3,66.3 78.632,66.632 78.632,67.132 U2.3 80.451,67.149 R5.1
VBAT: J2.1 J3.1 | length 14.9
  Top Layer w1: J2.1 74.595,84.715 74.595,86.814 75.181,87.4 81.4,87.4 82.5,86.3 J3.1
pads on no net: J1.3 J1.4 J1.5 J1.6 J2.3 U1.4 U3.5 U3.8 U3.10 U3.11 U4.4 U5.2 U5.3 U5.4 U5.5 U5.15 U5.16 U5.17 U5.20 U5.21 U6.1 U6.5 U6.6 U6.7 U6.8 U6.14

## Polygon pours and split planes (outlines as drawn)
3V3 on Top Layer "3V3_L01_P-001" (solid, pour order 0): 78.1,85.8 78.3,86 78.4,86.1 79.8,86.1 80.1,85.7 80.1,82.6 79.8,82.3 76.4,82.3 76.1,82.6 76.1,84.2 76.2,84.3 77.9,84.3 78.1,84.5
3V3 on Top Layer "3V3_L01_P-002" (solid, pour order 1): 79.1,74.2 79.3,74.4 79.3,75.6 79.5,75.8 80.5,75.8 80.8,75.5 80.8,74.7 81.3,74.2 81.7,73.8 81.7,72.7 80.025,72.7 79.8,72.475 79.8,70.2 80,70 81.1,70 81.4,69.7 81.4,68.4 81.2,68.2 80,68.2 79.8,68.4 79.8,69.3 78.7,70.4 78.15,70.4 77.875,70.675 77.875,73.925 78.15,74.2
GND on Bottom Layer "GND_L02_P-001" (solid, pour order 3): 71.5,66.202 71.5,65.15 ccw(c72.746,65.246) 72.65,64 94.375,64 ccw(c94.188,65.312) 95.5,65.125 95.5,87.725 ccw(c94.341,87.641) 94.425,88.8 72.65,88.8 ccw(c72.746,87.554) 71.5,87.65
3V3 on Bottom Layer "3V3_L02_P-001" (solid, pour order 2): 89.4,87 89.2,86.8 89.2,85.8 89.2,84.5 89.3,84.4 90.8,84.4 90.8,83.3 89.3,83.3 89.2,83.2 89.2,82.7 89.715,82.185 90.273,82.185 91.791,80.9 93.6,80.9 93.6,83.1 93,83.1 91.5,83.1 91.3,83.3 91.3,86.7 91,87

## Silkscreen, mask and mechanical layers (free items; w line width, h text height)
Top Overlay:
  drawing of 37 lines, arcs and shapes, not listed
Mechanical 1:
  lines w0.2: 71.5,87.5 71.5,85 71.5,65.27 ccw(c72.77,65.27) 72.77,64 94.23,64 ccw(c94.23,65.27) 95.5,65.27 95.5,87.5 95.5,87.63 ccw(c94.33,87.63) 94.33,88.8 72.77,88.8 ccw(c72.77,87.53) 71.5,87.53